# EAGLE board _Conversor Temperatura - 202  (EAGLE 9.7.0)

Size 171.4 x 73.67 mm. Coordinates in mm from the lower left corner, seen from the top.
Outline: 0,0 171.4,0 171.4,73.67 0,73.67 0,0
Copper layers (1*16): Top 0.035mm / dielectric 1.5mm / Bottom 0.035mm
Design rules "default": minimum track width 6mil, minimum drill 0.35mm, track to track 6mil, track to pad 6mil, pad to pad 6mil, via to via 6mil, smd to smd 6mil, copper to edge 40mil, drill to drill 6mil, minimum pad ring 10mil, minimum via ring 8mil, stop-mask expansion 4mil, vias tented up to drill 0mil, thermal gap 10mil

## Footprints (pad centres in the part's own frame; a part is rotated, then mirrored left to right if it is on the bottom)
LEDRD254W60D565H860B_B = drill 0.981 pad 1.581: 1 -1.27,0; 2 1.27,0
LEDRD254W60D565H860B_G = drill 0.981 pad 1.581: 1 -1.27,0; 2 1.27,0
LEDRD254W60D565H860B = drill 0.981 pad 1.581: 1 -1.27,0; 2 1.27,0
RESAD1016W63L850D250B = drill 0.83 pad 1.43: 1 -5.08,0; 2 5.08,0
ARDUINO-UNO-R3-SHIELD = drill 1.016 pad 1.88: 3.3V 24.13,-2.54; 5V 24.13,0; A0 24.13,12.7; A1 24.13,15.24; A2 24.13,17.78; A3 24.13,20.32; A4 24.13,22.86; A5 24.13,25.4; AREF -24.13,-13.97; D2 -24.13,20.32; D3 -24.13,17.78; D4 -24.13,15.24; D5 -24.13,12.7; D6 -24.13,10.16; D7 -24.13,7.62; D8 -24.13,3.81; D9 -24.13,1.27; D10 -24.13,-1.27; D11 -24.13,-3.81; D12 -24.13,-6.35; D13 -24.13,-8.89; GND@0 24.13,2.54; GND@1 24.13,5.08; GND@2 -24.13,-11.43; IOREF 24.13,-7.62; NC 24.13,-10.16; RES 24.13,-5.08; RX -24.13,25.4; SCL -24.13,-19.05; SDA -24.13,-16.51; TX -24.13,22.86; VIN 24.13,7.62
TO92 = drill 0.813 octagon: 1 -1.27,0; 2 0,1.905; 3 1.27,0

## Placement (x,y rotation side)
D1  BLUE  [LEDRD254W60D565H860B_B]  92.68,51.3 0 top
D2  BLUE  [LEDRD254W60D565H860B_B]  102.84,51.3 0 top
D3  BLUE  [LEDRD254W60D565H860B_B]  113,51.3 0 top
D4  GREEN  [LEDRD254W60D565H860B_G]  123.16,51.3 0 top
D5  RED  [LEDRD254W60D565H860B]  143.48,51.3 0 top
D6  GREEN  [LEDRD254W60D565H860B_G]  133.32,51.3 0 top
D7  RED  [LEDRD254W60D565H860B]  163.8,51.3 0 top
D8  RED  [LEDRD254W60D565H860B]  153.64,51.3 0 top
R1  1k  [RESAD1016W63L850D250B]  134.59,64 90 top
R2  1k  [RESAD1016W63L850D250B]  165.07,64 90 top
R4  1k  [RESAD1016W63L850D250B]  154.91,64 90 top
R5  1k  [RESAD1016W63L850D250B]  104.11,64 90 top
R6  1k  [RESAD1016W63L850D250B]  124.43,64 90 top
R7  1k  [RESAD1016W63L850D250B]  144.75,64 90 top
R9  1k  [RESAD1016W63L850D250B]  114.27,64 90 top
R10  1k  [RESAD1016W63L850D250B]  93.95,64 90 top
U1  ARDUINO-UNO-R3-SHIELD  [ARDUINO-UNO-R3-SHIELD]  47.88,43.83 270 top
U2  TMP36GT9Z_TO92  [TO92]  130.31,4.83 0 top

## Library data of the parts
D1-D3 = Tinkercad; CATEGORY: Opto-Electronic; SUB-CATEGORY: LED; VALUE: LED_BLUE
D4 D6 = Tinkercad; CATEGORY: Opto-Electronic; SUB-CATEGORY: LED; VALUE: LED_GREEN
D5 D7 D8 = Tinkercad; CATEGORY: Opto-Electronic; SUB-CATEGORY: LED; VALUE: LED_RED
R1 R2 R4-R7 R9 R10 U1 U2 = Tinkercad

## Nets
D1_C: D1.2 R10.1
D2_C: D2.2 R5.1
D3_C: D3.2 R9.1
D4_C: D4.2 R6.1
D5_C: D5.2 R7.1
D6_C: D6.2 R1.1
D7_C: D7.2 R2.1
D8_C: D8.2 R4.1
U1_5V: U1.5V U2.3
U1_A1: U1.A1 U2.2
U1_D2: D1.1 U1.D2
U1_D3: D2.1 U1.D3
U1_D4: D3.1 U1.D4
U1_D5: D4.1 U1.D5
U1_D6: D6.1 U1.D6
U1_D7: D5.1 U1.D7
U1_D8: D8.1 U1.D8
U1_D9: D7.1 U1.D9
U1_GND: R1.2 R2.2 R4.2 R5.2 R6.2 R7.2 R9.2 R10.2 U1.GND@0 U1.GND@1 U1.GND@2 U2.1

## Tracks (layer width: path | path; a pad name or v marks a point on that pad's centre or on a via)
D1_C  (1 unrouted)
D2_C  (1 unrouted)
D3_C  (1 unrouted)
D4_C  (1 unrouted)
D5_C  (1 unrouted)
D6_C  (1 unrouted)
D7_C  (1 unrouted)
D8_C  (1 unrouted)
U1_5V  (1 unrouted)
U1_A1  (1 unrouted)
U1_D2  (1 unrouted)
U1_D3  (1 unrouted)
U1_D4  (1 unrouted)
U1_D5  (1 unrouted)
U1_D6  (1 unrouted)
U1_D7  (1 unrouted)
U1_D8  (1 unrouted)
U1_D9  (1 unrouted)
U1_GND  (11 unrouted)